# Altium PCB yhn.PcbDoc
Units mm, origin at the board's own origin, x right, y up, seen from the top; angles counter-clockwise.
Board outline 30.1 x 25.4 mm, 2 copper layers (Top Layer, Bottom Layer), stack 1.571 mm thick; 40 components, 30 nets, 132 pads, 8 vias.
Unrouted connection lines stored in the file: 9.
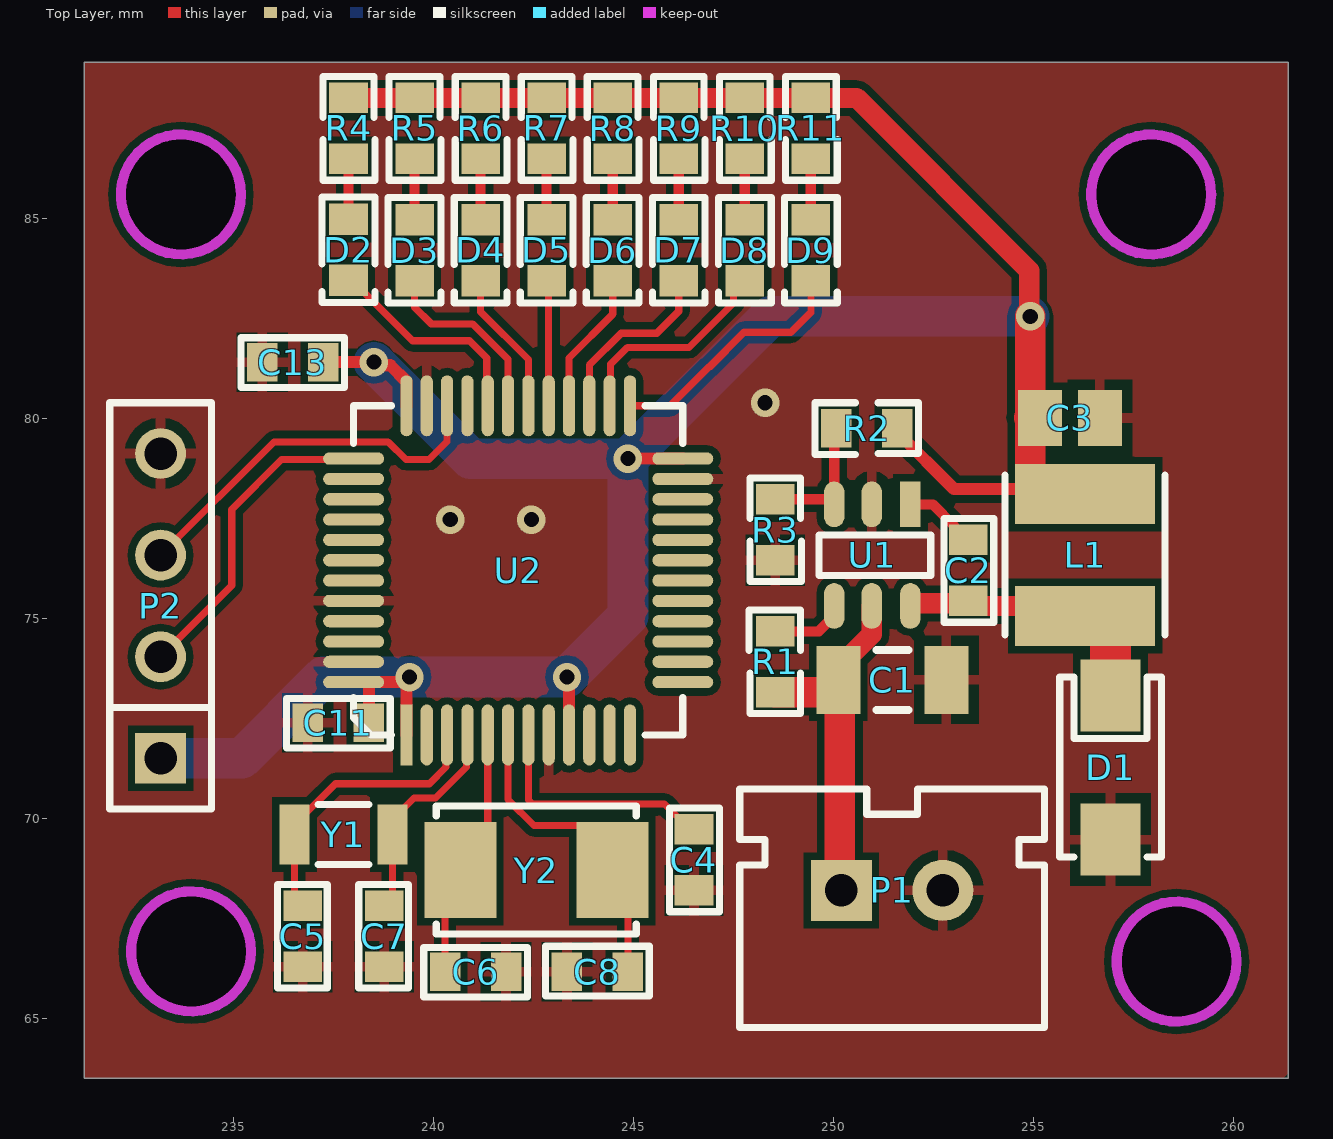
[diagram p0: Top Layer view]
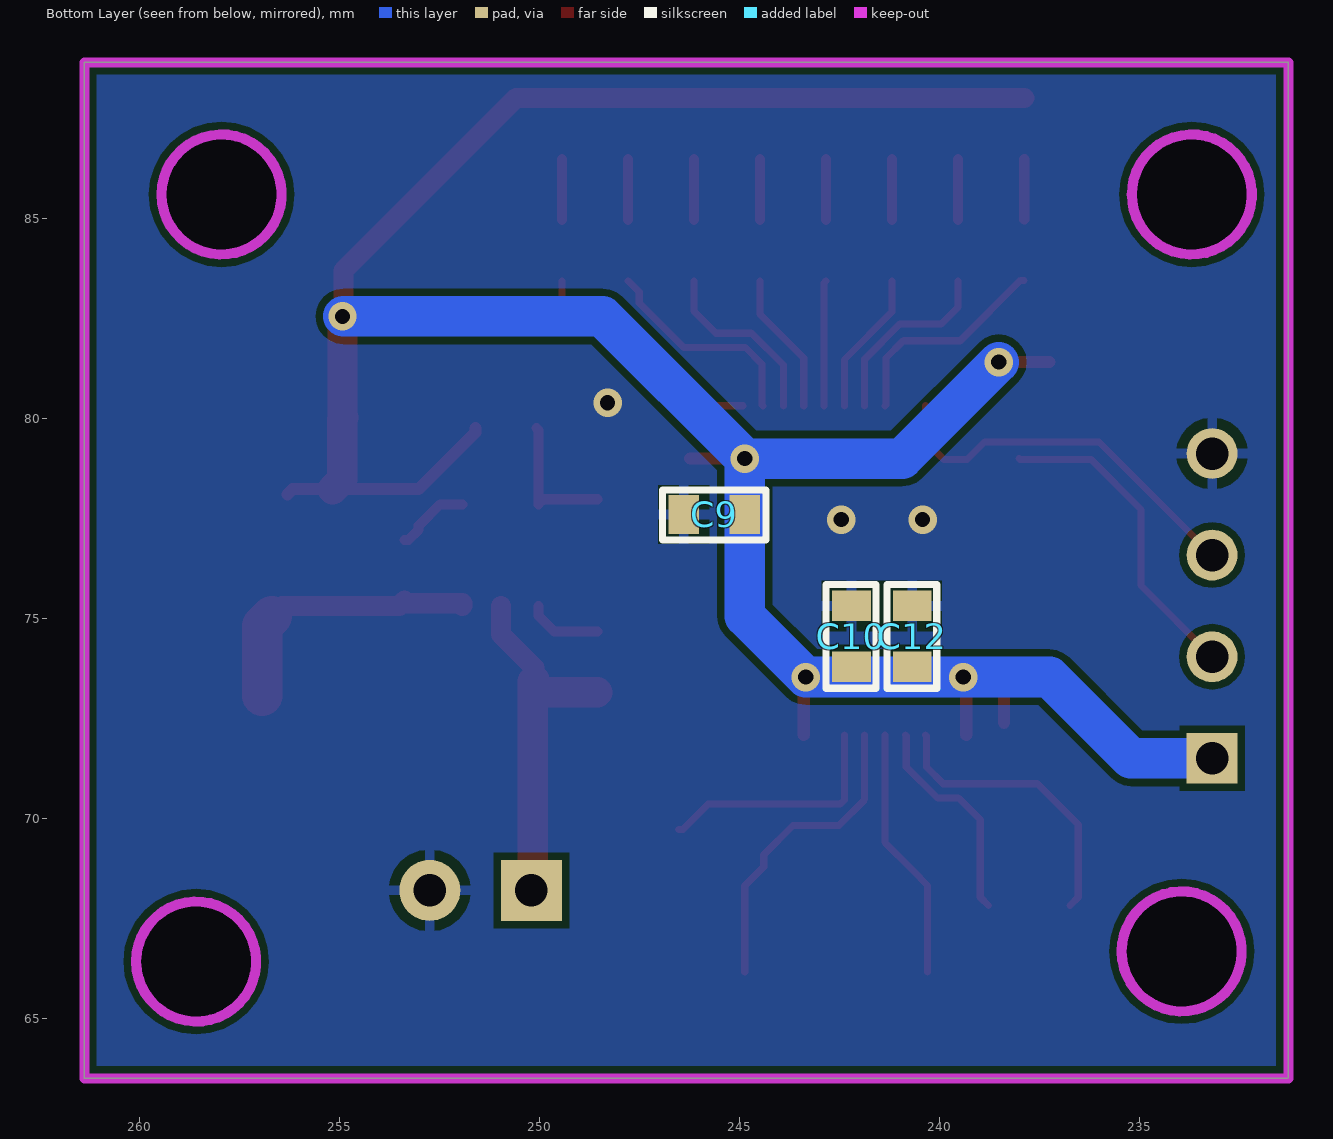
[diagram p1: Bottom Layer view, seen from below]
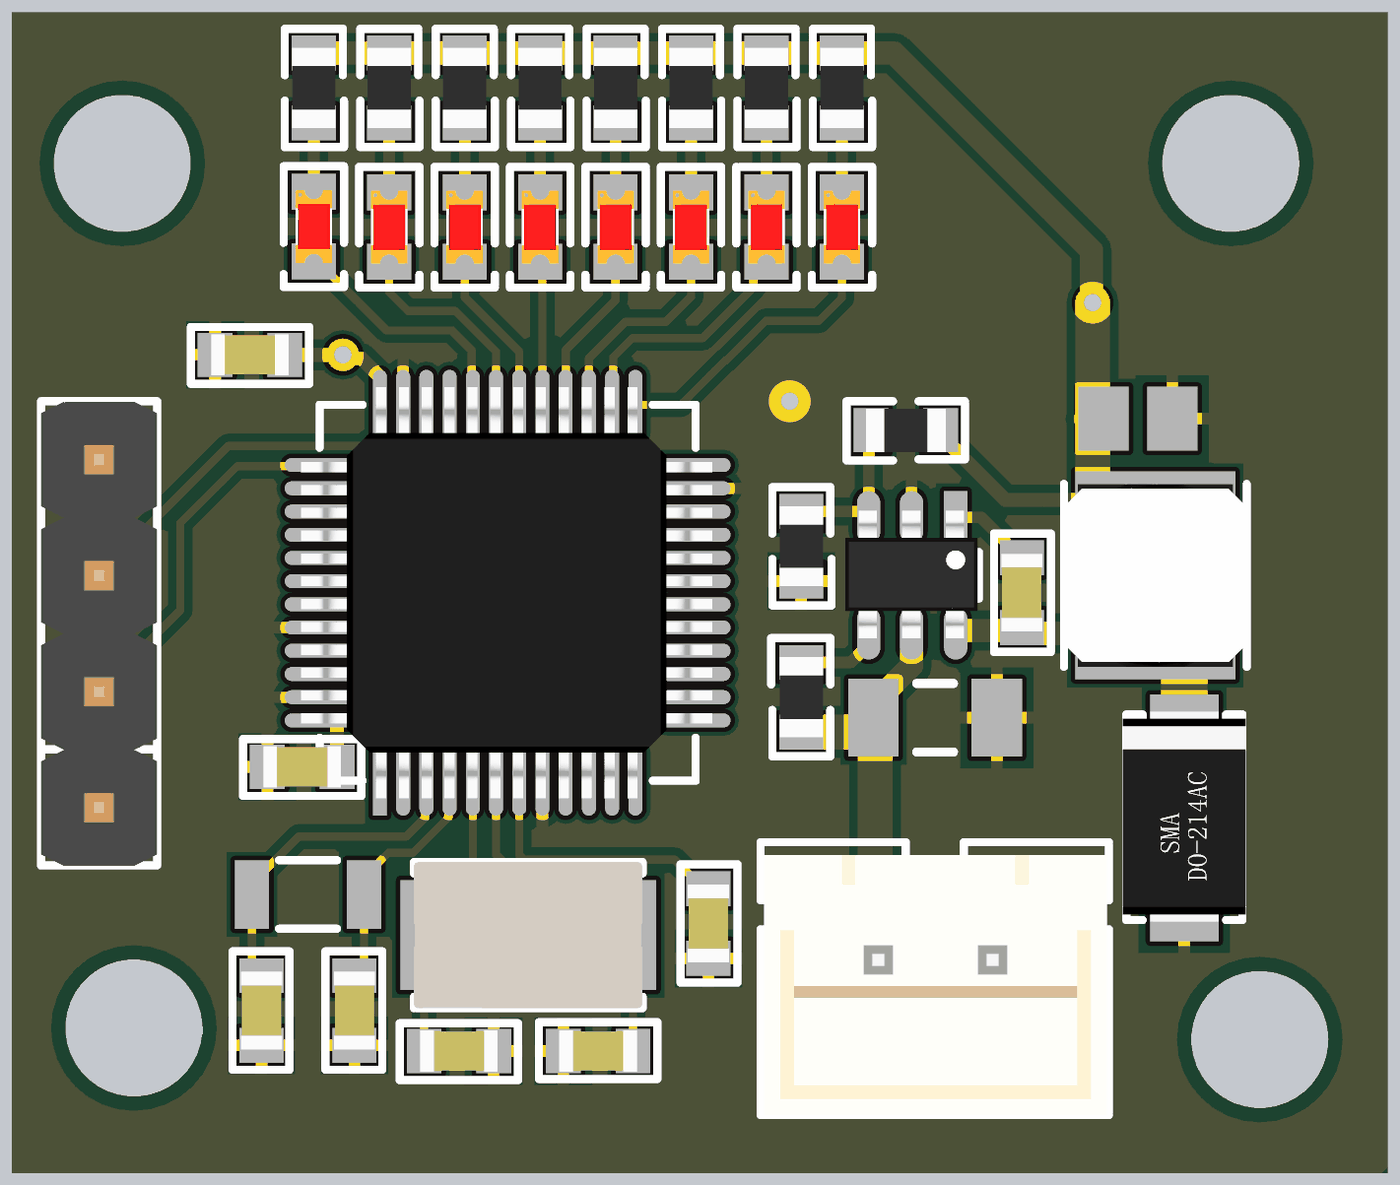
[diagram p2: 3D render of the assembled board from above, using the file's embedded part models]
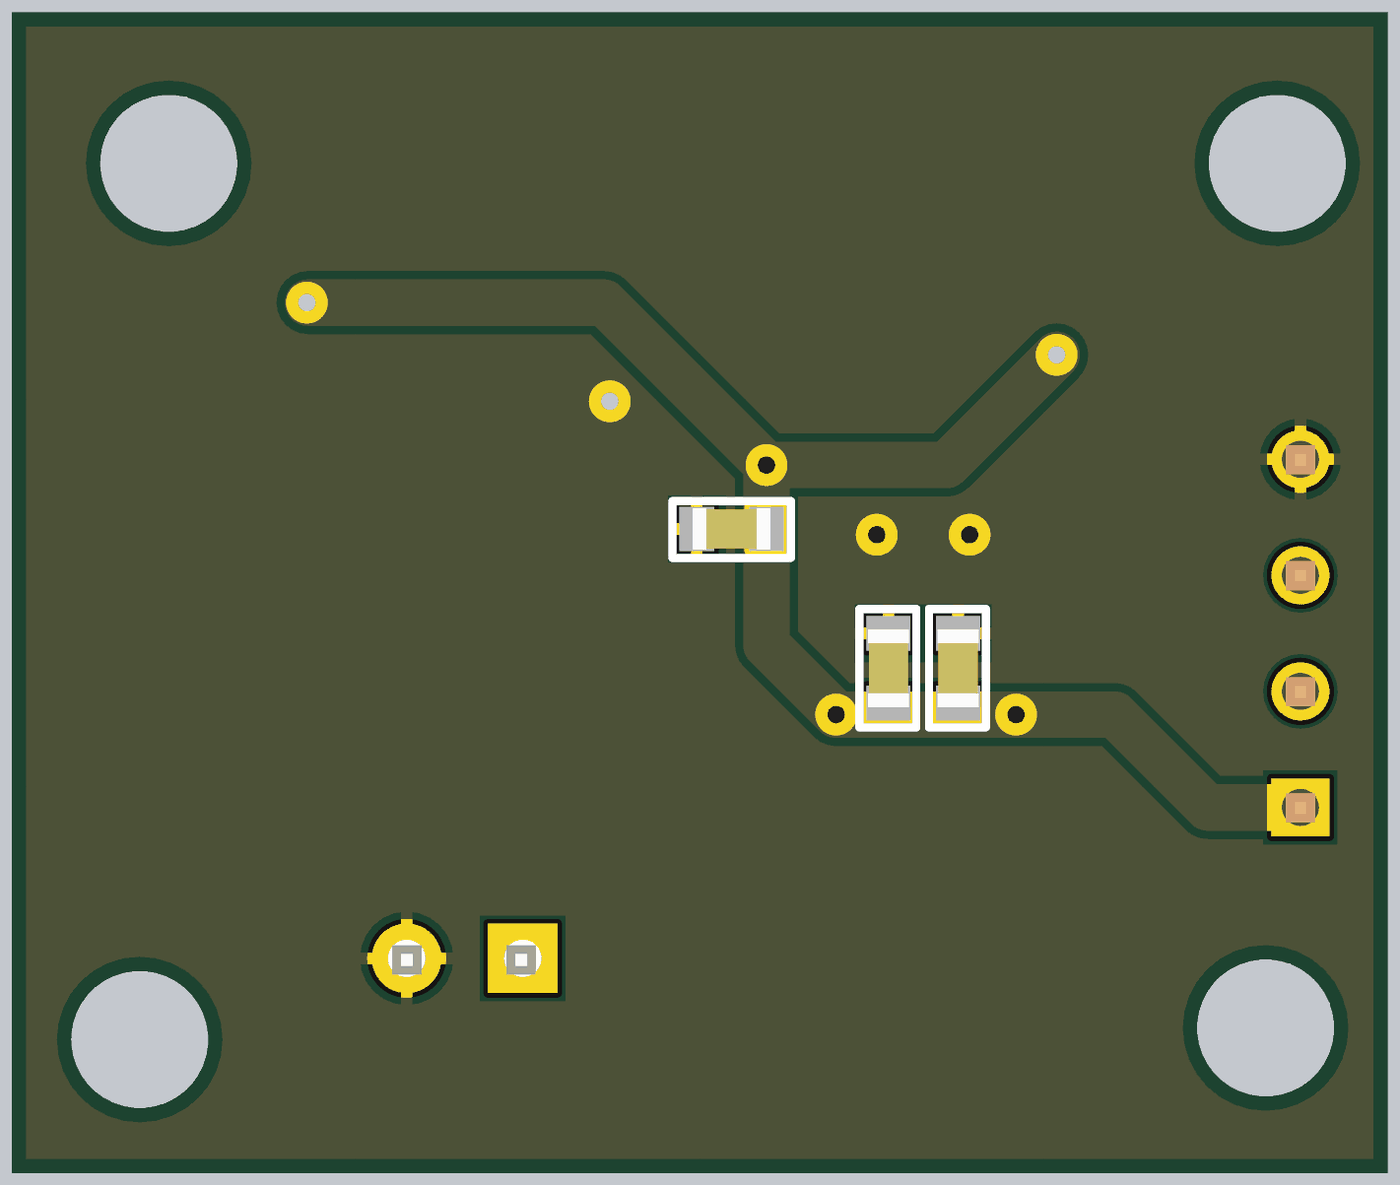
[diagram p3: 3D render of the assembled board from below, using the file's embedded part models]

## Layer stack, top to bottom
Top Solder: solder mask 0.0102, Solder Resist, Dk 3.5
Top Layer: signal copper 0.0356
Dielectric 1: dielectric 1.5, FR-4, Dk 4.8
Bottom Layer: signal copper 0.0356
Bottom Solder: solder mask 0.0102, Solder Resist, Dk 3.5

## Board outline
231.267,63.5 231.267,88.9 261.366,88.9 261.366,63.5
cut-out: 257.072,66.421 ccw(c258.572,66.421) 258.572,64.921 ccw(c258.572,66.421) 260.072,66.421 ccw(c258.572,66.421) 258.572,67.921 ccw(c258.572,66.421)
cut-out: 232.434,66.675 ccw(c233.934,66.675) 233.934,65.175 ccw(c233.934,66.675) 235.434,66.675 ccw(c233.934,66.675) 233.934,68.175 ccw(c233.934,66.675)
cut-out: 256.437,85.598 ccw(c257.937,85.598) 257.937,84.098 ccw(c257.937,85.598) 259.437,85.598 ccw(c257.937,85.598) 257.937,87.098 ccw(c257.937,85.598)
cut-out: 232.18,85.598 ccw(c233.68,85.598) 233.68,84.098 ccw(c233.68,85.598) 235.18,85.598 ccw(c233.68,85.598) 233.68,87.098 ccw(c233.68,85.598)

## Design rules (kind name [scope] priority, off if disabled: settings)
Clearance [All] p1: gap=0.178 ignorepadtopadclearanceinfootprint=FALSE
MinimumSolderMaskSliver [All] p1 off: minsoldermaskwidth=0.254
PolygonConnect PolygonConnect_1 [((InPadClass('All Pads')))] p1: connectstyle=Relief reliefconductorwidth=0.254 reliefentries=4 polygonreliefangle="90 Angle" airgapwidth=0.254
PolygonConnect [All] p2: connectstyle=Direct reliefconductorwidth=0.254 reliefentries=4 polygonreliefangle="90 Angle" airgapwidth=0.254
RoutingVias [All] p1: holewidth=0.711 width=1.27 viastyle="Through Hole" minholewidth=0.711 minwidth=1.27 maxholewidth=0.711 maxwidth=1.27
SilkToSilkClearance [All] p1 off: silktosilkclearance=0.254
SilkToSolderMaskClearance [IsPad] p1 off: minsilkscreentomaskgap=0.254 clearancetoexposedcopper=TRUE
SolderMaskExpansion [All] p1: expansion=0.102 istentingtop=FALSE
Width [All] p1: maxlimit=25.4 minlimit=0.178 preferedwidth=0.254
27 further rules are at their usual default settings.

## Components (designator, comment, footprint, x,y, rotation, side; value= is the part's Value field where it differs from the comment)
C1 "475" C1206 251.467,73.465 r180 top
C2 "103" C0603 253.365,75.438 r90 top
C3 "226" C0805 255.905,80.01 r180 top
C4 "104" C0603 246.507,68.199 r90 top
C5 "15p" C0603 236.728,67.818 r270 top
C6 "15p" C0603 240.284,66.167 r0 top
C7 "15p" C0603 238.76,67.818 r270 top
C8 "15p" C0603 244.856,66.167 r180 top
C9 "104" C0603 246.38,77.597 r180 bottom
C10 "104" C0603 242.189,75.311 r270 bottom
C11 "104" C0603 236.855,72.39 r0 top
C12 "104" C0603 240.665,75.311 r270 bottom
C13 "104" C0603 235.712,81.407 r0 top
D1 "B230A" SMA 256.921,69.469 r90 top
D2 "RED" LED0603-RED 237.871,84.976 r270 top
D3 "RED" LED0603-RED 239.522,84.963 r270 top
D4 "RED" LED0603-RED 241.173,84.963 r270 top
D5 "RED" LED0603-RED 242.824,84.963 r270 top
D6 "RED" LED0603-RED 244.475,84.963 r270 top
D7 "RED" LED0603-RED 246.126,84.963 r270 top
D8 "RED" LED0603-RED 247.777,84.963 r270 top
D9 "RED" LED0603-RED 249.428,84.963 r270 top
L1 "" L4X4 256.286,75.057 r90 top value=4μ7H
P1 "Header 2" XH2P54P2 250.19,68.199 r90 top
P2 "Header 4" SIP4 233.172,71.501 r90 top
R1 "" R0603 248.539,73.152 r90 top value=100K
R2 "" R0603 251.587,79.756 r180 top value=49K9
R3 "" R0603 248.539,77.978 r270 top value=16K2
R4 "" R0603 237.871,88.011 r270 top value=360R
R5 "" R0603 239.522,88.011 r270 top value=360R
R6 "" R0603 241.173,88.011 r270 top value=360R
R7 "" R0603 242.824,88.011 r270 top value=360R
R8 "" R0603 244.475,88.011 r270 top value=360R
R9 "" R0603 246.126,88.011 r270 top value=360R
R10 "" R0603 247.777,88.011 r270 top value=360R
R11 "" R0603 249.428,88.011 r270 top value=360R
U1 "MP2359" SOT23-6 251.912,77.847 r270 top
U2 "STM32F103C8Tx" PQFP48 239.324,72.09 r90 top
Y1 "32768" FC-135 237.744,69.596 r180 top
Y2 "8M" CY5032 244.465,68.707 r180 top

## Footprints (in the part's own frame and the unit in brackets; to place one, negate y for a bottom-side part, rotate by r counter-clockwise, add the part's x,y. Pads: shape width x height; smd on the part's side, far side on the other; paste and mask are expansions set on the pad)
C0603 [mil]
  rect 30x38 smd: 1(0,0) 2(60,0)
  silkscreen extent -21,-25 81,24, body extent -3,-18 63,18, height 35
C0805 [mm] "Chip Capacitor, Body 2.0x1.3mm, IPC High Density"
  rect 1.1x1.4 smd: 1(-0.75,0) 2(0.75,0)
  body extent -1.1,-0.72 1.1,0.72, height 1.4
C1206 [mm] "Chip Capacitor, Body 3.2x1.6mm, IPC High Density"
  rect 1.1x1.7 smd: 1(-1.35,0) 2(1.35,0)
  silkscreen extent -0.4,-0.75 0.4,0.75, body extent -1.7,-0.9 1.7,0.9, height 1.3
CY5032 [mm]
  rect 1.8x2.4 smd: 1(0,0) 2(3.8,0)
  silkscreen extent -0.6,-1.6 4.4,1.6, body extent -0.59,-1.6 4.41,1.6, height 1.23
FC-135 [mm]
  rect 0.75x1.5 smd: 1(-1.225,0) 2(1.225,0)
  silkscreen extent -0.64,-0.75 0.64,0.75, body extent -1.6,-0.75 1.6,0.75
L4X4 [mm]
  rect 1.5x3.5 smd: 1(0,0) 2(3.048,0)
  silkscreen extent -0.48,-2 3.52,2, body extent -0.48,-2 3.52,2, height 1.02
LED0603-RED [mil]
  rect 31x38 smd: 1(0,0) 2(60,0)
  silkscreen extent -22,-26 82,26, body extent -1,-16 61,16, height 24
PQFP48 [mil]
  rect 60x12 smd: 1(-0.17,0.2)
  oval 60x12 smd: 2(-0.17,-19.8) 3(-0.17,-39.8) 4(-0.17,-59.8) 5(-0.17,-79.8) 6(-0.17,-99.8) 7(-0.17,-119.8) 8(-0.17,-139.8) 9(-0.17,-159.8) 10(-0.17,-179.8) 11(-0.17,-199.8) 12(-0.17,-219.8) 25(323.83,-219.8) 26(323.83,-199.8) 27(323.83,-179.8) 28(323.83,-159.8) 29(323.83,-139.8) 30(323.83,-119.8) 31(323.83,-99.8) 32(323.83,-79.8) 33(323.83,-59.8) 34(323.83,-39.8) 35(323.83,-19.8) 36(323.83,0.2)
  oval 12x60 smd: 13(51.83,-271.8) 14(71.83,-271.8) 15(91.83,-271.8) 16(111.83,-271.8) 17(131.83,-271.8) 18(151.83,-271.8) 19(171.83,-271.8) 20(191.83,-271.8) 21(211.83,-271.8) 22(231.83,-271.8) 23(251.83,-271.8) 24(271.83,-271.8) 37(271.83,52.2) 38(251.83,52.2) 39(231.83,52.2) 40(211.83,52.2) 41(191.83,52.2) 42(171.83,52.2) 43(151.83,52.2) 44(131.83,52.2) 45(111.83,52.2) 46(91.83,52.2) 47(71.83,52.2) 48(51.83,52.2)
  silkscreen extent 0,-272 324,52, body extent -15,-286 339,68, height 57
R0603 [mil]
  rect 30x38 smd: 1(0,0) 2(60,0)
  silkscreen extent -21,-25 81,26, body extent -4,-19 64,19, height 22
SIP4 [mil]
  rect 50x50 hole 32: 1(0,0)
  round 50 hole 32: 2(100,0) 3(200,0) 4(300,0)
  silkscreen extent -50,-50 350,50, body extent -50,-50 350,50, height 337
SMA [mm]
  rect 1.8x1.5 smd: 1(0,0) 2(3.6,0)
  silkscreen extent -0.43,-1.27 4.07,1.27, body extent -0.47,-1.35 4.13,1.35, height 2.4
SOT23-6 [mil]
  rect 45x20 smd: 1(-0.17,0.2)
  oval 45x20 smd: 2(-0.17,-37.8) 3(-0.17,-74.8) 4(99.83,-74.8) 5(99.83,-37.8) 6(99.83,0.2)
  silkscreen extent 30,-90 70,20, body extent -6,-95 104,19, height 57
XH2P54P2 [mil]
  rect 60x60 hole 32: 1(0,0)
  round 60 hole 32: 2(0,-100)
  silkscreen extent -135,-200 100,100, body extent -135,-198 89,97, height 276

## Part data
C1 C2 C3 C4 C5 C6 C7 C8 C9 C10 C11 C12 C13: library part Cap, "Capacitor", LatestRevisionDate=17-Jul-2002, LatestRevisionNote="Re-released for DXP Platform.", PackageDescription="Radial Cap, Thru-Hole; 2 Leads; 0.3 in Pin Spacing", PackageReference=RAD-0.3, Published=8-Jun-2000, Publisher="Altium Limited"
D1: library part "Diode BAS70", "Silicon AF Schottky Diode for High-Speed Switching", ComponentLink1Description="Manufacturer Link", ComponentLink1URL=http://www.infineon.com/, ComponentLink2Description=Datasheet, ComponentLink2URL=http://www.infineon.com/upload/Document/cmc_upload/documents/009/382/bas40_bas140series_1.pdf, DatasheetVersion=Oct-1999, LatestRevisionDate=29-May-2009, LatestRevisionNote="IPC-7351 Footprint Added.", Note="Pin 2 is not connected and not drawn.", PackageDescription="3-Pin SOT-23 Package 0.95 mm Pitch, 2.5 mm Lead Span", PackageReference=SOT-23, PackageVersion=Sep-2001, Published=21-Mar-2003, Publisher="Altium Limited"
D2 D3 D4 D5 D6 D7 D8 D9: library part LED0, "Typical INFRARED GaAs LED", LatestRevisionDate=08-Jul-2005, LatestRevisionNote="Mech Layer 1 removed.", PackageDescription="LED; 2 Leads", PackageReference=LED-0, Published=8-Jun-2000, Publisher="Altium Limited"
L1: library part Inductor, Code_IEC=1005, Code_JEITA=0402, LatestRevisionDate=29-May-2009, LatestRevisionNote="IPC-7351 Footprint Added.", PackageDescription="Chip Inductor", PackageReference=0402-A, Published=8-Jun-2000, Publisher="Altium Limited"
P1: library part "Header 2H", "Header, 2-Pin, Right Angle", LatestRevisionDate=17-Jul-2002, LatestRevisionNote="Re-released for DXP Platform.", Publisher="Altium Limited"
P2: "Header, 4-Pin", LatestRevisionDate=17-Jul-2002, LatestRevisionNote="Re-released for DXP Platform.", Publisher="Altium Limited"
R1 R2 R3 R4 R5 R6 R7 R8 R9 R10 R11: library part Res2, "Resistor", LatestRevisionDate=17-Jul-2002, LatestRevisionNote="Re-released for DXP Platform.", PackageDescription="Axial Device, Thru-Hole; 2 Leads; 0.4 in Pin Spacing", PackageReference=AXIAL-0.4, Published=8-Jun-2000, Publisher="Altium Limited"
Y1 Y2: library part XTAL, "Crystal Oscillator", LatestRevisionDate=17-Jul-2002, LatestRevisionNote="Re-released for DXP Platform.", PackageDescription="Crystal, Thru-Hole; 2 Leads; Body 3.1 x 8.2 mm (Dia.xH)", PackageReference=R38, Published=8-Jun-2000, Publisher="Altium Limited"

## Via types
v1: diameter 0.711, hole 0.381, Top Layer to Bottom Layer, 8 vias

## Nets (pads, with @x,y where several pads share a name; then routed paths per layer and width w, separated by ;. In a path a pad name is that pad's centre, name@x,y a point inside that pad or via, vN(x,y) a via of type N, cw(c..) or ccw(c..) an arc to the next point about the centre after c; other vN are vias at no path point)
3V3: C3.2 C9.2 C10.2 C11.2 C12.2 C13.2 L1.2 P2.1 R2.1 R4.1 R5.1 R6.1 R7.1 R8.1 R9.1 R10.1 R11.1 U2.1 U2.9 U2.24 U2.36 U2.48 | length 74.8
  Top Layer w0.305: C13.2 v1(238.506,81.407) 238.584,81.329 238.914,81.329 239.319,80.924 U2.36 ; C11.2 238.379,73.406 v1@239.158,73.406 ; U2.1 239.319,73.457 v1(239.395,73.533) ; v1(243.332,73.533) 243.383,73.482 U2.9 ; v1(244.856,78.994) U2.24 ; R2.1 251.587,79.654 253.009,78.232 255.159,78.232 256.159,78.232 L1.2
  Top Layer w0.508: R4.1 R5.1 R6.1 R7.1 R8.1 R9.1 R10.1 R11.1 250.571,88.011 254.889,83.693 v1@254.889,82.55
  Top Layer w0.762: C3.2@254.889,80.01 254.917,79.982 254.917,78.474 L1.2@255.159,78.232 ; C3.2@254.913,80.01 v1(254.913,82.55)
  Bottom Layer w1.016: P2.1 235.204,71.501 237.236,73.533 v1(239.395,73.533) v1(243.332,73.533) 244.856,75.057 v1(244.856,78.994) ; v1(238.506,81.407) 240.919,78.994 v1(244.856,78.994) ; v1@254.889,82.55 248.412,82.55 v1(244.856,78.994)
GND: C1.1 C3.1 C4.1 C5.2 C6.2 C7.2 C8.2 C9.1 C10.1 C11.1 C12.1 C13.1 D1.1 P1.2 P2.4 R3.2 U1.2 U2.8 U2.23 U2.35 U2.44 U2.47
  other v1: 240.411,77.47 242.443,77.47 248.285,80.391
LED0: D9.2 U2.25 | length 6.3
  Top Layer w0.178: U2.25 245.906,80.315 246.871,81.28 246.888,81.28 247.76,82.152 248.93,82.152 249.428,82.65 D9.2
LED1: D8.2 U2.26 | length 5.4
  Top Layer w0.178: U2.26 244.423,80.339 244.423,81.355 244.841,81.773 246.384,81.773 247.494,82.883 247.494,83.156 D8.2
LED2: D7.2 U2.27 | length 4.6
  Top Layer w0.178: U2.27 243.891,81.331 244.688,82.128 245.577,82.128 246.126,82.677 D7.2
LED3: D6.2 U2.28 | length 3.6
  Top Layer w0.178: U2.28 243.383,81.513 244.475,82.605 D6.2
LED4: D5.2 U2.29 | length 3.1
  Top Layer w0.178: D5.2 242.875,83.388 U2.29
LED5: D4.2 U2.30 | length 3.6
  Top Layer w0.178: D4.2 241.173,82.667 242.367,81.473 U2.30
LED6: D3.2 U2.31 | length 4.7
  Top Layer w0.178: D3.2 239.522,82.779 239.937,82.364 240.973,82.364 241.859,81.478 U2.31
LED7: D2.2 U2.32 | length 5.5
  Top Layer w0.178: D2.2 237.96,83.452 239.47,81.942 240.892,81.942 241.327,81.507 241.327,80.339 U2.32
NetC2_1: C2.1 D1.2 L1.1 U1.6 | length 7.1
  Top Layer w0.508: U1.6 251.917,75.374 253.301,75.374 C2.1 253.492,75.311 256.425,75.311 L1.1@256.679,75.057
  Top Layer w1.016: L1.1@256.679,75.057 256.921,74.815 D1.2
NetC2_2: C2.2 U1.1 | length 1.9
  Top Layer w0.254: U1.1 252.476,77.851 253.009,77.318 253.009,77.216 253.263,76.962 C2.2
NetC4_2: C4.2 U2.7 | length 6.1
  Top Layer w0.178: U2.7 242.367,70.462 242.471,70.358 245.77,70.358 246.405,69.723 C4.2
NetD2_1: D2.1 R4.2 | length 1.5
  Top Layer w0.254: D2.1 R4.2
NetD3_1: D3.1 R5.2 | length 1.5
  Top Layer w0.254: D3.1 R5.2
NetD4_1: D4.1 R6.2 | length 1.5
  Top Layer w0.254: D4.1 R6.2
NetD5_1: D5.1 R7.2 | length 1.5
  Top Layer w0.254: D5.1 R7.2
NetD6_1: D6.1 R8.2 | length 1.5
  Top Layer w0.254: D6.1 R8.2
NetD7_1: D7.1 R9.2 | length 1.5
  Top Layer w0.254: D7.1 R9.2
NetD8_1: D8.1 R10.2 | length 1.5
  Top Layer w0.254: D8.1 R10.2
NetD9_1: D9.1 R11.2 | length 1.5
  Top Layer w0.254: D9.1 R11.2
NetR1_2: R1.2 U1.4 | length 1.9
  Top Layer w0.254: R1.2 249.626,74.676 250.012,75.062 U1.4
NetR2_2: R2.2 R3.1 U1.3 | length 3.4
  Top Layer w0.254: R3.1 249.895,77.978 U1.3@250.012,77.861 ; U1.3 U1.3@250.012,77.861 ; R2.2 250.012,79.705 U1.3@250.012,77.861
OSC32_IN: C5.1 U2.3 Y1.2 | length 7.3
  Top Layer w0.178: C5.1 236.519,68.027 Y1.2 236.519,69.844 237.541,70.866 239.894,70.866 240.311,71.283 240.311,72.061 U2.3
OSC32_OUT: C7.1 U2.4 Y1.1 | length 5.4
  Top Layer w0.178: C7.1 238.969,68.027 238.969,69.971 239.508,70.51 240.041,70.51 240.819,71.288 240.819,72.061 U2.4
OSC_IN: C6.1 U2.5 Y2.2 | length 6.4
  Top Layer w0.178: C6.1 240.284,68.326 Y2.2 241.351,69.393 U2.5
OSC_OUT: C8.1 U2.6 Y2.1 | length 7.8
  Top Layer w0.178: U2.6 241.859,70.467 242.508,69.818 243.654,69.818 244.382,69.09 244.382,68.79 244.856,68.316 C8.1
SWCLK: P2.2 U2.37 | length 8
  Top Layer w0.178: P2.2 234.95,75.819 234.95,77.724 236.196,78.97 237.974,78.97 U2.37
SWDIO: P2.3 U2.34 | length 9.6
  Top Layer w0.178: P2.3 236.004,79.413 238.862,79.413 239.304,78.971 239.88,78.971 240.335,79.426 U2.34
VCC: C1.2 P1.1 R1.1 U1.5 | length 9.3
  Top Layer w0.508: C1.2 250.117,73.765 250.952,74.6 U1.5
  Top Layer w0.762: R1.1 249.948,73.152 250.117,73.321 C1.2 250.153,73.428 250.153,68.236 P1.1
pads on no net: U2.2 U2.10 U2.11 U2.12 U2.13 U2.14 U2.15 U2.16 U2.17 U2.18 U2.19 U2.20 U2.21 U2.22 U2.33 U2.38 U2.39 U2.40 U2.41 U2.42 U2.43 U2.45 U2.46

## Polygon pours and split planes (outlines as drawn)
GND on Top Layer "GND_L01_P012" (solid, pour order 12): 231.267,88.9 261.366,88.9 261.366,63.627 261.239,63.5 231.267,63.5
GND on Top Layer "GND_L01_P005" (solid, pour order 5): 236.22,83.693
GND on Bottom Layer "GND_L02_P011" (solid, pour order 11): 231.267,88.9 261.366,88.9 261.366,63.5 231.267,63.5

## Keep-outs
Bottom Layer:
  the board outline again, w0.254
Keep-Out Layer:
  circle w0.254: c258.572,66.421 r1.5
  circle w0.254: c257.937,85.598 r1.5
  circle w0.254: c233.934,66.675 r1.5
  circle w0.254: c233.68,85.598 r1.5